# Altium PCB MCB2.PcbDoc
Units mil, origin at the board's own origin, x right, y up, seen from the top; angles counter-clockwise.
Board outline 1299.21 x 792.2 mil, 2 copper layers (Top Layer, Bottom Layer); 45 components, 56 nets, 211 pads, 60 vias.
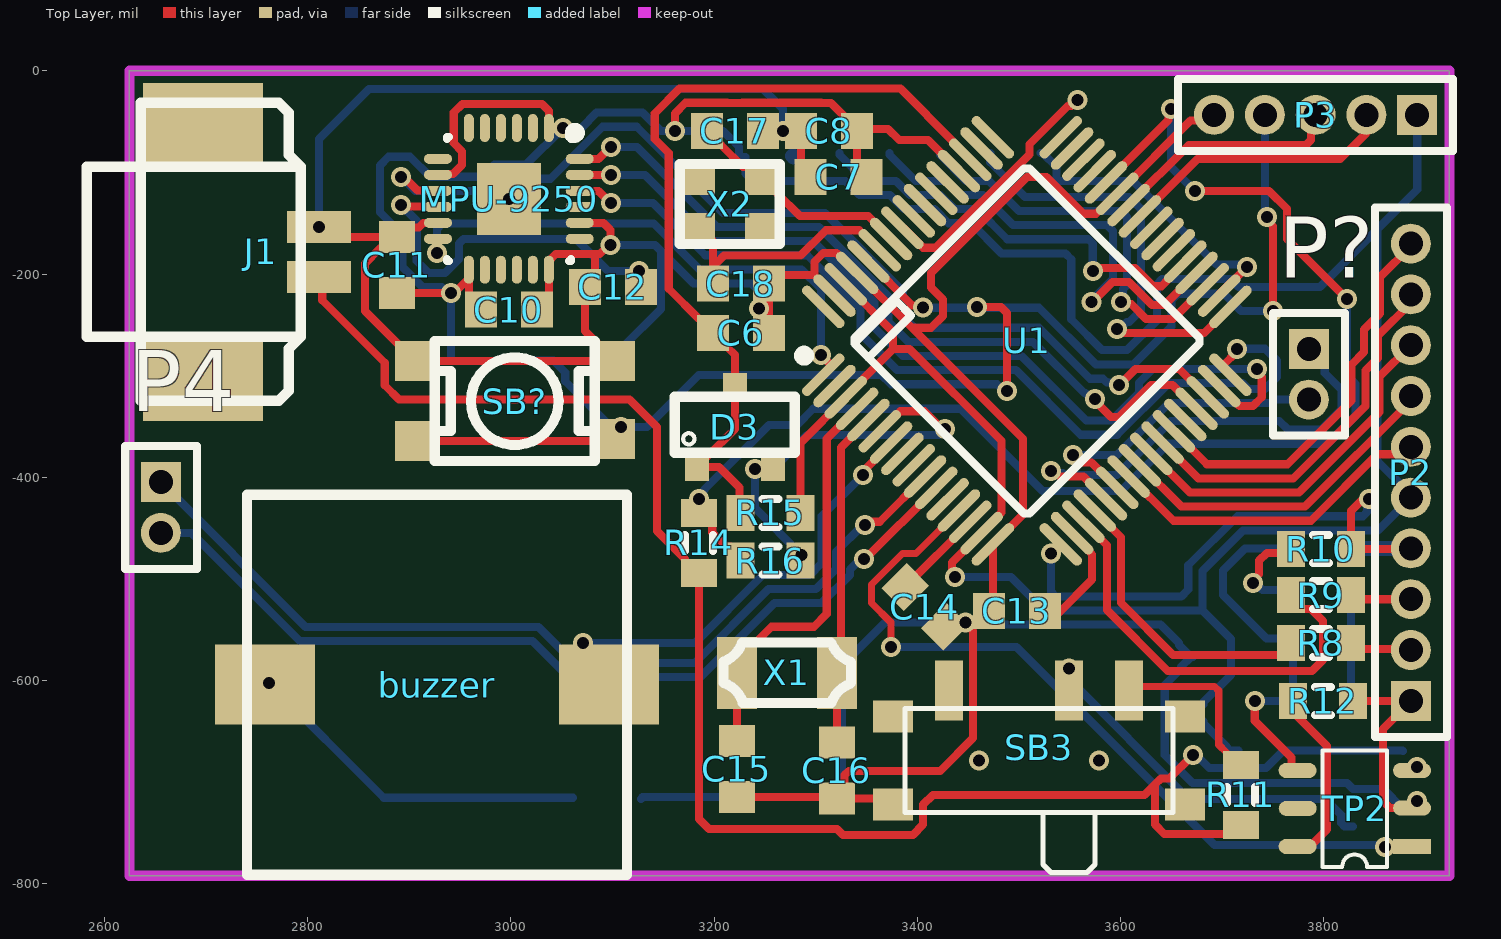
[diagram p0: Top Layer view]
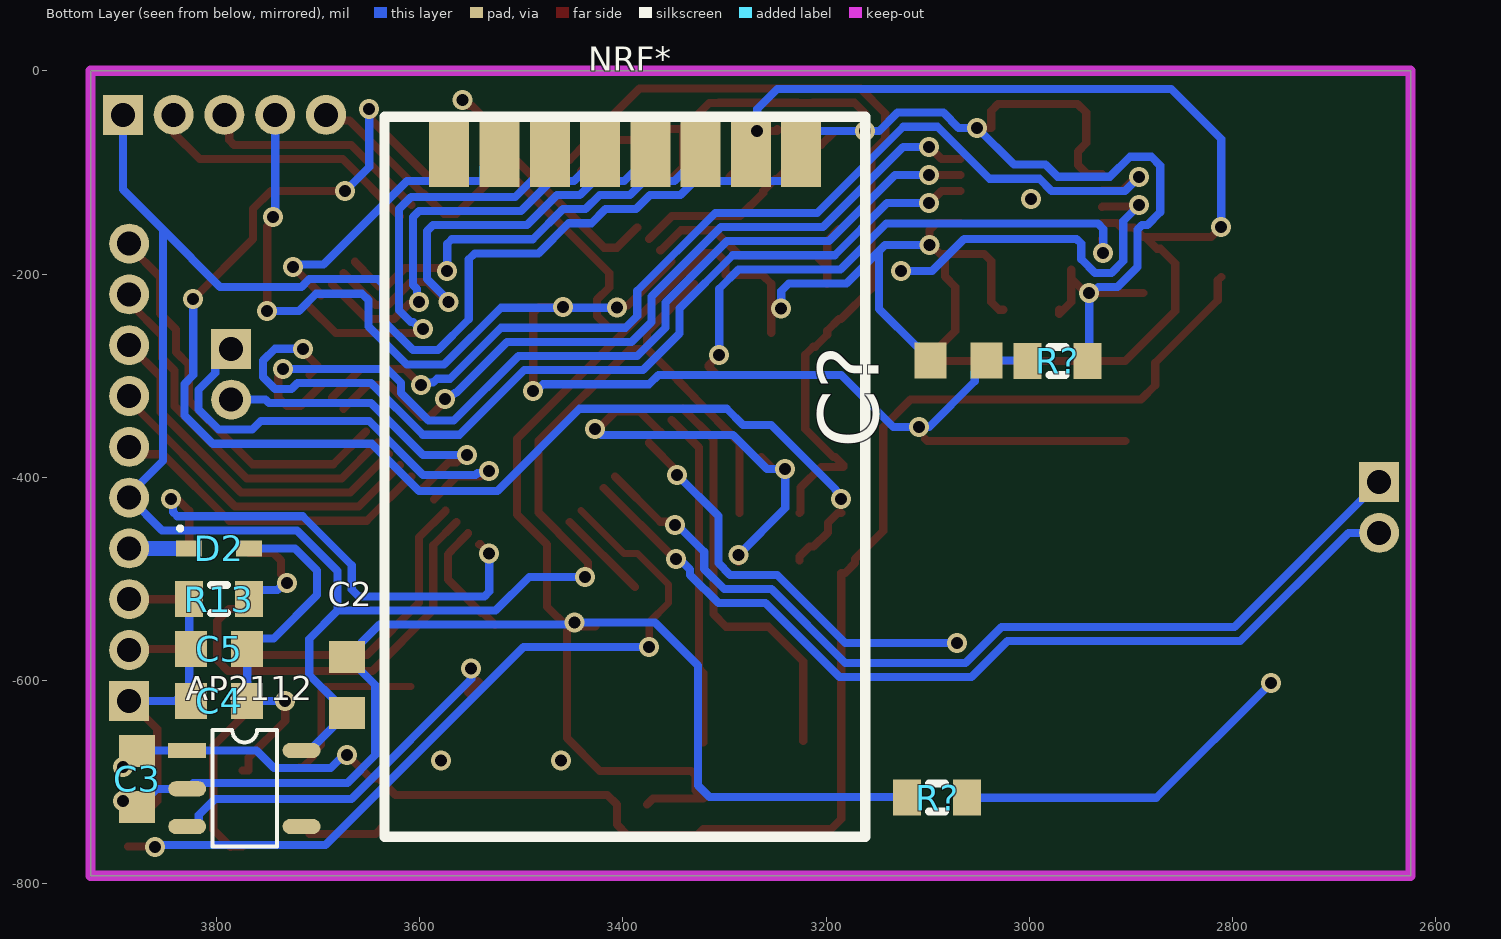
[diagram p1: Bottom Layer view, seen from below]

## Layer stack, top to bottom
Top Solder: solder mask 0.4, Solder Resist, Dk 3.5
Top Layer: signal copper 1.4
Dielectric 1: dielectric 12.6, FR-4, Dk 4.8
Bottom Layer: signal copper 1.4
Bottom Solder: solder mask 0.4, Solder Resist, Dk 3.5

## Board outline
2624.61,-792.2 3923.82,-792.2 3923.82,0 2624.61,0

## Design rules (kind name [scope] priority, off if disabled: settings)
Clearance [All] p1: gap=5.91 ignorepadtopadclearanceinfootprint=FALSE
ComponentClearance [All] p1: gap=7 collisioncheckmode=3 verticalgap=0 showdistances=FALSE
PolygonConnect [All] p1: connectstyle=Relief reliefconductorwidth=10 reliefentries=4 polygonreliefangle="90 Angle" airgapwidth=10
RoutingVias [All] p1: holewidth=28 width=50 viastyle="Through Hole" minholewidth=11.81 minwidth=19.68 maxholewidth=28 maxwidth=50
SolderMaskExpansion [All] p1: expansion=4
Width [All] p1: maxlimit=40 minlimit=7 preferedwidth=20
29 further rules are at their usual default settings.

## Components (designator, comment, footprint, x,y, rotation, side; value= is the part's Value field where it differs from the comment)
AP2112 "AP2112" SOT-23-5 3803.94,-648.82 r180 bottom
buzzer "Buzzer" HN9650B-3 3112.6,-420.54 r270 top
C2 "Cap Semi" 1608[0603] 3671.26,-604.33 r270 bottom value=100pF
C3 "Cap Semi" 1608[0603] 3877.95,-696.85 r90 bottom value=100pF
C4 "Cap Semi" 1608[0603] 3797.24,-620.08 r180 bottom value=100pF
C5 "Cap Semi" 1608[0603] 3797.24,-568.9 r180 bottom value=100pF
C6 "Cap Semi" 1608[0603] 3226.38,-257.85 r180 top value=100pF
C7 "Cap Semi" 1608[0603] 3322.61,-104.33 r0 top value=100pF
C8 "Cap Semi" 1608[0603] 3312.99,-59.06 r0 top value=100pF
C10 "Cap Semi" 1608[0603] 2998.03,-235.14 r180 top value=100pF
C11 "Cap Semi" 1608[0603] 2887.8,-190.94 r270 top value=100pF
C12 "Cap Semi" 1608[0603] 3100.39,-212.6 r0 top value=100pF
C13 "Cap Semi" 1608[0603] 3498.03,-531.5 r0 top value=100pF
C14 "Cap Semi" 1608[0603] 3407.65,-527.56 r135 top value=100pF
C15 "Cap Semi" 1608[0603] 3222.44,-687.01 r270 top value=100pF
C16 "Cap Semi" 1608[0603] 3320.87,-688.56 r270 top value=100pF
C17 "Cap Semi" 1608[0603] 3220.47,-59.06 r0 top value=100pF
C18 "Cap Semi" 1608[0603] 3226.38,-209.57 r0 top value=100pF
C? "Cap Semi" 1608[0603] 3069.43,-285.13 r180 bottom value=100pF
D2 "Schottky" SOD-523 3797.24,-470.08 r180 bottom
D3 "Vref" SOT-23 3220.47,-311.02 r0 top
J1 "Plug2" Terminal_block_2pin_1.25mm_SMD 2696.85,-177.17 r90 top
MPU-9250 "24Pin" QFN_24PIN 2998.03,-125.99 r270 top
NRF* "NRF24L01" NRF24L01_Module_SMD 3161.42,-753.94 r0 bottom
P2 "MHDR1X10" MHDR1X10 3885.83,-620.08 r90 top
P3 "MHDR1X5" MHDR1X5 3892.13,-43.31 r180 top
P4 "MHDR1X2" MHDR1X2 2655.51,-404.72 r270 top
P? "MHDR1X2" MHDR1X2 3785.43,-273.62 r270 top
R8 "Res3" J1-0603 3797.24,-562.99 r0 top value=1K
R9 "Res3" J1-0603 3797.24,-516.14 r0 top value=1K
R10 "Res3" J1-0603 3797.24,-470.47 r0 top value=1K
R11 "Res3" J1-0603 3718.5,-712.6 r90 top value=1K
R12 "Res3" J1-0603 3799.21,-620.08 r180 top value=1K
R13 "Res3" J1-0603 3797.24,-520.08 r180 bottom value=1K
R14 "Res3" J1-0603 3185.04,-464.57 r270 top value=1K
R15 "Res3" J1-0603 3255.46,-435.04 r0 top value=1K
R16 "Res3" J1-0603 3255.46,-482.07 r180 top value=1K
R? "Res3" J1-0603 3090.55,-715.48 r180 bottom value=1K
R? "Res3" J1-0603 2972.22,-285.43 r0 bottom value=1K
SB3 "SPDT" SS-SK-02P 3517.72,-679.13 r0 top
SB? "SPST" "TACK-SW_SMD 2P 4x3mm_2" 2925.2,-384.16 r90 top
TP2 "TP-4057" SOT-23-6 3862.2,-783.46 r180 top
U1 "NUC240SE3AE" MCU_LQFP_64_7x7 3507.87,-265.75 r45 top
X1 "Xtal" FC-135 3258.27,-659.45 r0 top value=32.768k
X2 "Xtal" 2520S 3248.03,-155.58 r180 top value=12M

## Footprints (in the part's own frame and the unit in brackets; to place one, negate y for a bottom-side part, rotate by r counter-clockwise, add the part's x,y. Pads: shape width x height; smd on the part's side, far side on the other; paste and mask are expansions set on the pad)
1608[0603] [mm] "Chip Capacitor, Body 1.6x0.8mm, IPC High Density"
  rect 0.8x0.9 smd: 1(-0.7,0) 2(0.7,0)
  body extent -0.87,-0.48 0.87,0.48, height 1.3
2520S [mm]
  rect 0.9x0.8 smd: 1(0,-1.25) 2(1.65,0) ""(0,0) ""(1.65,-1.25)
  silkscreen extent -0.43,-1.63 2.07,0.37
FC-135 [mm]
  rect 1x1.8 smd: 1(-0.91,1.7) 2(1.59,1.7)
  silkscreen extent -1.24,0.94 1.94,2.46
HN9650B-3 [mm]
  rect 2x2.5 smd: 1(4.665,-0.41) 2(4.665,-9.005)
  silkscreen extent -0.08,-9.46 9.42,0.04
J1-0603 [mm] "Chip Resistor, Body 1.6x0.8mm, IPC High Density"
  rect 0.7x0.9 smd: 1(-0.75,0) 2(0.75,0)
  silkscreen extent -0.2,-0.35 0.2,0.35, body extent -0.85,-0.48 0.85,0.48, height 0.9
MCU_LQFP_64_7x7 [mm]
  oval 1.4x0.25 smd: 1(-4.2,3) 2(-4.2,2.6) 3(-4.2,2.2) 4(-4.2,1.8) 5(-4.2,1.4) 6(-4.2,1) 7(-4.2,0.6) 8(-4.2,0.2) 9(-4.2,-0.2) 10(-4.2,-0.6) 11(-4.2,-1) 12(-4.2,-1.4) 13(-4.2,-1.8) 14(-4.2,-2.2) 15(-4.2,-2.6) 16(-4.2,-3) 33(4.2,-3) 34(4.2,-2.6) 35(4.2,-2.2) 36(4.2,-1.8) 37(4.2,-1.4) 38(4.2,-1) 39(4.2,-0.6) 40(4.2,-0.2) 41(4.2,0.2) 42(4.2,0.6) 43(4.2,1) 44(4.2,1.4) 45(4.2,1.8) 46(4.2,2.2) 47(4.2,2.6) 48(4.2,3)
  oval 0.25x1.4 smd: 17(-3,-4.2) 18(-2.6,-4.2) 19(-2.2,-4.2) 20(-1.8,-4.2) 21(-1.4,-4.2) 22(-1,-4.2) 23(-0.6,-4.2) 24(-0.2,-4.2) 25(0.2,-4.2) 26(0.6,-4.2) 27(1,-4.2) 28(1.4,-4.2) 29(1.8,-4.2) 30(2.2,-4.2) 31(2.6,-4.2) 32(3,-4.2) 49(3,4.2) 50(2.6,4.2) 51(2.2,4.2) 52(1.8,4.2) 53(1.4,4.2) 54(1,4.2) 55(0.6,4.2) 56(0.2,4.2) 57(-0.2,4.2) 58(-0.6,4.2) 59(-1,4.2) 60(-1.4,4.2) 61(-1.8,4.2) 62(-2.2,4.2) 63(-2.6,4.2) 64(-3,4.2)
  silkscreen extent -4.32,-3.1 3.1,3.8, body extent -3.5,-3.5 3.5,3.5, height 1.6
MHDR1X2 [mm] "Connector; Header; 2 Position"
  rect 1x1 hole 0.6: 1(0,0)
  round 1 hole 0.6: 2(1.27,0)
  silkscreen extent -0.9,-0.9 2.17,0.9
MHDR1X5 [mm] "Connector; Header; 5 Position"
  rect 1x1 hole 0.6: 1(0,0)
  round 1 hole 0.6: 2(1.27,0) 3(2.54,0) 4(3.81,0) 5(5.08,0)
  silkscreen extent -0.9,-0.9 5.98,0.9
MHDR1X10 [mm] "Connector; Header; 10 Position"
  rect 1x1 hole 0.6: 1(0,0)
  round 1 hole 0.6: 2(1.27,0) 3(2.54,0) 4(3.81,0) 5(5.08,0) 6(6.35,0) 7(7.62,0) 8(8.89,0) 9(10.16,0) 10(11.43,0)
  silkscreen extent -0.9,-0.9 12.33,0.9
NRF24L01_Module_SMD [mm]
  rect 1x1.7 smd: 1(1.6,-17.1) 2(2.857,-17.1) 3(4.114,-17.1) 4(5.371,-17.1) 5(6.629,-17.1) 6(7.886,-17.1) 7(9.143,-17.1) 8(10.4,-17.1)
  silkscreen extent 0,-18 12.02,0
QFN_24PIN [mm]
  oval 0.7x0.249 smd: 1(-1.772,1) 2(-1.772,0.6) 3(-1.772,0.2) 4(-1.772,-0.2) 5(-1.772,-0.6) 6(-1.772,-1) 13(1.772,-1) 14(1.772,-0.6) 15(1.772,-0.2) 16(1.772,0.2) 17(1.772,0.6) 18(1.772,1)
  oval 0.249x0.7 smd: 7(-1,-1.772) 8(-0.6,-1.772) 9(-0.2,-1.772) 10(0.2,-1.772) 11(0.6,-1.772) 12(1,-1.772) 19(1,1.772) 20(0.6,1.772) 21(0.2,1.772) 22(-0.2,1.772) 23(-0.6,1.772) 24(-1,1.772)
  rect 1.8x1.6 smd: 25(0,0)
  silkscreen extent -1.77,-1.55 1.55,1.78, body extent -1.55,-1.55 1.55,1.55, height 1
SOD-523 [mm] "SODFL, 2-Leads, Body 0.80x1.60mm, IPC Medium Density"
  rect 0.65x0.4 smd: 1(-0.75,0) 2(0.75,0)
  silkscreen extent -1.03,0.45 -0.93,0.55, body extent -0.65,-0.45 0.65,0.45, height 0.65
SOT-23 [mm]
  rect 0.6x0.7 smd: 1(-0.95,-2) 2(0,0) 3(0.95,-2)
  silkscreen extent -1.5,-1.65 1.5,-0.25
SOT-23-5 [mm]
  rect 0.95x0.38 smd: 1(-0.63,-0.51)
  oval 0.95x0.38 smd: 2(-0.63,-1.47) 3(-0.63,-2.41) 4(2.23,-2.41) 5(2.23,-0.51)
  silkscreen extent 0,-2.91 1.61,0
SOT-23-6 [mm]
  rect 0.95x0.38 smd: 1(-0.63,-0.51)
  oval 0.95x0.38 smd: 2(-0.63,-1.47) 3(-0.63,-2.41) 4(2.23,-2.41) 5(2.227,-1.461) 6(2.23,-0.51)
  silkscreen extent 0,-2.91 1.61,0
SS-SK-02P [mm]
  rect 0.7x1.5 smd: 1(-2.195,1.76) 2(0.805,1.76) 3(2.305,1.76)
  rect 1x0.8 smd: ""(-3.595,-1.09) ""(-3.595,1.11) ""(3.705,-1.09) ""(3.705,1.11)
  silkscreen extent -3.29,-2.79 3.41,1.31
"TACK-SW_SMD 2P 4x3mm_2" [mm]
  rect 1x1 smd: 1(0.5,0.5) 1(0.55,-4.5) 2(2.5,0.5) 2(2.5,-4.5)
  silkscreen extent 0,-4 3,0
Terminal_block_2pin_1.25mm_SMD [mm]
  rect 0.8x1.6 smd: 1(-0.65,-2.9) 2(0.6,-2.9)
  rect 2.1x3 smd: ""(-3.2,0) ""(3.15,0)
  silkscreen extent -3.75,-2.45 3.7,2.9

## Part data
C2 C3 C4 C5 C6 C7 C8 C10 C11 C12 C13 C14 C15 C16 C17 C18 C?: "Capacitor (Semiconductor SIM Model)", LatestRevisionDate=29-May-2009, LatestRevisionNote="IPC-7351 Footprint Added.", PackageDescription="Chip Capacitor", PackageReference=C1206, Published=8-Jun-2000, Publisher="Altium Limited"
D2: library part Diode2
MPU-9250: library part MPU-9250_2
NRF*: library part NRF24L01_module
P2: "Header, 10-Pin", LatestRevisionDate=17-Jul-2002, LatestRevisionNote="Re-released for DXP Platform.", Publisher="Altium Limited"
P3: "Header, 5-Pin", LatestRevisionDate=17-Jul-2002, LatestRevisionNote="Re-released for DXP Platform.", Publisher="Altium Limited"
P4 P?: "Header, 2-Pin", LatestRevisionDate=17-Jul-2002, LatestRevisionNote="Re-released for DXP Platform.", Publisher="Altium Limited"
R8 R9 R10 R11 R12 R13 R14 R15 R16 R? R?: "Resistor", LatestRevisionDate=29-May-2009, LatestRevisionNote="IPC-7351 Footprint Added.", PackageDescription="Chip Resistor", PackageReference=J1-0603, Published=8-Jun-2000, Publisher="Altium Limited"
SB3: library part Switch_Button2
SB?: library part Switch_Button1
U1: OriginalSymbolOrigin=(0,0)

## Via types
v1: diameter 19.68, hole 11.81, Top Layer to Bottom Layer, 59 vias
v2: diameter 19.68, hole 11.81, Top Layer to Bottom Layer, tented top, 1 vias

## Nets (pads, with @x,y where several pads share a name; then routed paths per layer and width w, separated by ;. In a path a pad name is that pad's centre, name@x,y a point inside that pad or via, vN(x,y) a via of type N, cw(c..) or ccw(c..) an arc to the next point about the centre after c; other vN are vias at no path point)
ADC0: R14.1 R16.2 U1.44 | length 1336.7
  Top Layer w8: R14.1 3188.43,-435.04 3198.21,-444.82 3198.21,-454.34 3212.22,-468.35 3216.15,-468.35 3225.93,-478.13 R16.2 ; U1.44 3647.37,-48.3 3647.37,-39.64 v1(3649.61,-37.4) ; v1(3673.23,-118.11) 3746.25,-118.11 3763.91,-135.77 3763.91,-165.48 v1(3822.83,-224.41)
  Bottom Layer w8: v1(3185.04,-421.26) 3185.04,-418.1 3190.52,-412.62 3190.52,-411.85 3253.94,-348.43 3281.88,-348.43 3297.7,-332.61 3442.48,-332.61 3523.32,-413.45 3600.61,-413.45 3646.94,-367.12 3803.45,-367.12 3831.46,-339.11 3831.46,-308.13 3822.83,-299.51 v1(3822.83,-224.41) ; v1(3649.61,-37.4) 3649.61,-94.49 v1(3673.23,-118.11)
ADC1: U1.45
ADC2: U1.46
ADC3: U1.47
ADC4: U1.48
ADC5: U1.49
ADC6: U1.50
ADC_ONOFF: D3.3 R16.1 U1.6 | length 423.6
  Top Layer w8: v1(3240.16,-391.73) 3251.97,-391.73 D3.3@3263.73,-379.97 ; R16.1 3286.25,-483.33 v1(3286.25,-476.38) ; U1.6 3363.61,-354.83 3383.31,-335.13 3393.53,-335.13 3407.29,-335.13 3424.52,-352.36 v1(3427.17,-352.36)
  Bottom Layer w8: v1(3286.25,-476.38) 3240.16,-430.29 v1(3240.16,-391.73) 3258.24,-391.73 3291.71,-358.27 3421.26,-358.27 v1(3427.17,-352.36)
AVDD: AP2112.5 C2.2 C7.2 C8.2 C10.2 C11.2 MPU-9250.1 MPU-9250.8 MPU-9250.13 NRF*.1 P2.5 P3.1 R15.2 R?.1@2942.69,-285.43 U1.3 U1.15 U1.52 U1.62 | length 3905.8
  Top Layer w8: C11.2 v1(2940.94,-218.5) 2944.32,-218.5 MPU-9250.13@2958.66,-204.16 ; MPU-9250.8@2928.25,-101.42 2943.26,-101.42 2951.93,-92.75 2951.93,-79.3 2943.86,-71.22 2943.86,-41.19 2952.53,-32.52 3030.55,-32.52 3037.4,-39.37 MPU-9250.1 v1(3051.18,-56.21) ; MPU-9250.13 MPU-9250.13@2958.66,-204.16 ; C10.2 2970.47,-239.38 2958.66,-227.57 MPU-9250.13@2958.66,-204.16 ; v1(3161.42,-59.06) 3161.42,-41.96 3171.95,-31.43 3212.76,-31.43 3212.83,-31.5 3228.12,-31.5 3228.18,-31.43 3305.28,-31.43 3305.35,-31.5 3314.96,-31.5 C8.2@3340.55,-57.09 ; R15.2 3284.99,-366.14 U1.3 3329.71,-320.93 3346.63,-304 3346.63,-303.19 3376.21,-273.62 ; U1.62 3329.71,-210.57 3376.21,-257.07 3376.21,-273.62 ; C8.2 3340.55,-94.71 C7.2 ; C8.2@3340.55,-55.12 C8.2@3340.55,-57.09 ; C8.2@3341.54,-58.07 C8.2@3340.55,-57.09 ; v1(3437.01,-498.03) 3434.29,-495.31 3434.29,-484.1 U1.15 3463.33,-454.55 3483.03,-434.86 3483.03,-364.13 3392.52,-273.62 3376.21,-273.62 ; U1.52 3410.44,-68.09 3382.32,-68.09 3371.32,-57.09 C8.2@3340.55,-57.09
  Bottom Layer w8: R?.1@2942.69,-285.43 2940.94,-283.68 v1(2940.94,-218.5) 2937.78,-218.5 2932.07,-212.79 2913.23,-212.79 2893.51,-193.07 2893.51,-165.19 2893.57,-165.13 2893.57,-156.32 2888.89,-151.64 2883.55,-151.64 2871.09,-139.18 2871.09,-93.11 2879.62,-84.58 2900.95,-84.58 2920.57,-104.2 2972.22,-104.2 2984.09,-92.33 3015.05,-92.33 v1(3051.18,-56.21) 3069.43,-56.21 3084.49,-41.15 3129.71,-41.15 3147.63,-59.06 v1(3161.42,-59.06) 3208.72,-59.06 3224.41,-74.74 NRF*.1 ; NRF*.1@3228.91,-84.65 3230.88,-84.65 3230.88,-100.96 3238.25,-108.33 3329.44,-108.33 3343.34,-122.24 3373.17,-122.24 3387.08,-136.14 3416.91,-136.14 3430.81,-150.05 3453.28,-150.05 3482.87,-179.64 3545.78,-179.64 3551.64,-185.5 3551.64,-244.55 3581.99,-274.9 3606.6,-274.9 3635.83,-245.67 3635.83,-210.3 3641.1,-205.03 3708.6,-205.03 3716.23,-212.66 3796.45,-212.66 3852.74,-156.37 ; v1(3437.01,-498.03) 3492.13,-498.03 3525.23,-531.14 3680.71,-531.14 ; C2.2 C2.2@3673.23,-631.89 ; AP2112.5 3704.96,-668.9 3704.94,-665.57 3681.48,-642.11 3681.48,-640.14 C2.2@3673.23,-631.89 ; P3.1 3892.13,-116.98 3852.74,-156.37 ; C2.2@3673.23,-631.89 3681.48,-623.64 3681.48,-621.67 3708.66,-594.49 3708.66,-559.09 3680.71,-531.14 ; 3680.71,-531.14 3680.71,-492.43 3720.84,-452.3 3853.61,-452.3 P2.5 3885.83,-416.88 3852.74,-383.79 3852.74,-156.37
button: P2.10 U1.27 | length 392.6
  Top Layer w8: U1.27 3685.03,-387.23 3764.37,-387.23 3827.26,-324.34 3827.26,-289.32 3839.65,-276.93 3839.65,-254.75 3855.49,-238.9 3855.49,-203.05 3885.83,-172.72 P2.10
buzzer: buzzer.1 U1.7 | length 414.5
  Top Layer w8: v1(3346.46,-397.64) 3346.46,-394.26 3374.25,-366.47 U1.7
  Bottom Layer w8: v1(3070.87,-562.99) 3181.1,-562.99 3247.97,-496.13 3294.43,-496.13 3306,-484.56 3306,-438.1 v1(3346.46,-397.64)
CHRG: TP2.1 U1.13 | length 780
  Top Layer w7: v1(3374.02,-566.93) 3374.02,-542.78 3355.1,-523.86 3355.1,-505.57 3385.66,-475 3398.84,-475 U1.13
  Top Layer w8: v1(3860.24,-763.78) 3860.43,-763.58 3886.81,-763.58 TP2.1
  Bottom Layer w8: v1(3374.02,-566.93) 3497.7,-566.93 3692.58,-761.81 3858.27,-761.81 v1(3860.24,-763.78)
D12I: C18.1 U1.59 X2.2 | length 244.4
  Top Layer w8: X2.2@3187.01,-155.58 3187.07,-155.58 3198.82,-167.33 3198.82,-188.45 ; C18.1 3198.82,-188.45 ; U1.59 3362.61,-176.66 3342.92,-156.97 3310.16,-156.97 3285.18,-181.95 3209.78,-181.95 3203.28,-188.45 3198.82,-188.45
D12O: C17.1 U1.58 X2.1 | length 227.7
  Top Layer w8: C17.1 3192.91,-61.02 3204.66,-72.77 3206.63,-72.77 3228.48,-94.62 3236.28,-94.62 X2.1 3250,-106.37 3261.75,-118.11 3261.75,-120.08 3284.73,-143.06 3351.78,-143.06 U1.58
D+: R8.1 U1.20 | length 294.9
  Top Layer w8: U1.20 3574.69,-433.28 3600.52,-459.11 3600.52,-523.58 3651.87,-574.94 3755.77,-574.94 R8.1
D-: R9.1 U1.19 | length 421
  Top Layer w8: U1.19 3586.61,-466.98 3586.61,-530.68 3646.55,-590.61 3788.56,-590.61 3799.21,-579.96 3799.21,-541.34 3787.73,-529.86 3777.5,-529.86 3767.72,-520.08 R9.1
DVBUS: D2.1 P2.4 R10.2 U1.17 | length 605.9
  Top Layer w8: v1(3531.5,-475) 3540.31,-466.19 U1.17 3541.1,-466 U1.17@3539.89,-466 ; v1(3844.48,-421.26) 3838.58,-421.26 3826.77,-433.06 R10.2 3885.43,-470.47 P2.4
  Bottom Layer w8: v1(3531.5,-475) 3531.5,-512.54 3536.18,-517.23 3659.94,-517.23 3666.8,-510.37 3666.8,-486.67 3715.08,-438.39 3838.58,-438.39 3842.65,-434.32 3842.65,-423.09 v1(3844.48,-421.26)
  Bottom Layer w15: D2.1 P2.4
GND: AP2112.2 C2.1 C3.1 C4.1 C5.1 C6.1 C7.1 C8.1 C10.1 C11.1 C12.1 C13.1 C14.1 C15.2 C16.2 C17.2 C18.2 C?.1 J1.2 MPU-9250.11 MPU-9250.18 MPU-9250.20 NRF*.2 P2.1 P3.5 R12.1 R13.1 R?.1@3120.08,-715.48 SB3.@3376.18,-722.05 SB?.2 TP2.2 U1.16 U1.43 U1.61 U1.63 | length 4717.1
  Top Layer w8: v1(2811.02,-153.54) 2820.87,-163.39 C11.1@2885.83,-163.39 ; MPU-9250.11 2927.91,-149.95 2913.84,-149.95 2909.42,-154.37 2896.81,-154.37 C11.1 C11.1@2885.83,-163.39 ; C10.1 3029.83,-235.14 3037.4,-227.57 3037.4,-187.01 3044.25,-180.16 3082.83,-180.16 ; MPU-9250.20 3091.07,-149.61 3098.06,-156.6 v1(3098.06,-171.49) 3096.2,-171.49 3087.53,-180.16 3082.83,-180.16 ; C15.2 3319.31,-714.57 C16.2 ; C17.2@3248.03,-57.09 C17.2 3283.46,-59.06 3285.43,-57.09 C8.1 3285.43,-94.71 C7.1 ; C6.1 C18.2 3262.5,-201.01 3298.87,-201.01 3298.87,-187.92 3307.56,-179.24 3320.64,-179.24 3340.34,-198.93 U1.61 3394.83,-252.92 ; SB3.@3376.18,-722.05 3370.26,-716.12 C16.2 ; C14.1 C14.1@3443.76,-547.05 ; P3.5 3686.47,-48.97 3668.98,-48.97 U1.43 3596.46,-120.99 3596.06,-120.58 3575.96,-140.68 3563.67,-140.68 3527.32,-104.33 3508.09,-104.33 3413.39,-199.04 3413.39,-213.12 3425.26,-224.99 3425.26,-241.35 3413.69,-252.92 3394.83,-252.92 ; R12.1 P2.1 3858.27,-647.64 3858.27,-718.5 3865.35,-725.59 TP2.2 ; C11.1@2885.83,-163.39 2874.08,-175.13 2870.89,-175.13 2856.3,-189.73 2856.3,-236.52 2905.51,-285.73 3102.36,-285.73 3072.83,-256.21 C12.1 3082.83,-202.61 3082.83,-180.16 ; C16.2 3328.59,-708.39 3328.59,-693.06 3332.68,-688.98 3422.66,-688.98 3454.98,-656.65 3454.98,-551.18 3450.85,-547.05 C14.1@3443.76,-547.05 ; 3394.83,-252.92 3504.06,-362.16 3504.06,-436.59 U1.16 3474.47,-527.5 C13.1 3458.84,-543.13 v1(3447.67,-543.13) C14.1@3443.76,-547.05
  Bottom Layer w8: v1(2811.02,-153.54) 2811.02,-66.93 2860.24,-17.72 3248.03,-17.72 3267.72,-37.4 v1(3267.72,-59.06) ; C?.1 3096.99,-283.16 3108.74,-271.41 3110.71,-271.41 3147.74,-234.38 3147.74,-177.17 ; v1(3098.06,-171.49) 3142.06,-171.49 3147.74,-177.17 ; R?.1@3127.95,-716.54 3129.71,-714.78 3314.75,-714.78 3326,-703.52 3326,-585.39 3368.27,-543.13 v1(3447.67,-543.13) 3449.58,-545.04 3639.53,-545.04 3657.54,-563.06 3657.54,-565.02 C2.1@3669.29,-576.77 ; v1(3244.09,-233.75) 3244.09,-216.71 3236.68,-209.29 3179.86,-209.29 3147.74,-177.17 ; C2.1 C2.1@3669.29,-576.77 ; P3.5@3685.04,-43.31 P3.5 ; R13.1 3826.77,-606.3 3840.55,-620.08 P2.1 ; C3.1 3875.98,-724.41 3867.74,-716.16 3867.74,-715.48 3858.95,-706.69 AP2112.2 3822.83,-700.79 3670.89,-700.79 3643.64,-673.53 3643.64,-604.39 3659.54,-588.49 3659.54,-586.52 C2.1@3669.29,-576.77
  Bottom Layer w15: NRF*.2@3277.56,-83.8 NRF*.2@3278.4,-84.65
  other v1: 3892.13,-718.5
ICE_CLK: P3.3 U1.42 | length 232.6
  Top Layer w8: U1.42 3667.32,-72.9 3754.38,-72.9 3754.45,-72.83 3782.72,-72.83 3787.4,-68.15 3787.4,-48.03 P3.3
ICE_DAT: P3.2 U1.41 | length 274.7
  Top Layer w8: U1.41 3675.68,-86.8 3816.41,-86.8 3842.13,-61.09 P3.2
LED1: P2.6 U1.23 | length 325.9
  Top Layer w8: U1.23 3608.59,-399.37 3652.07,-442.85 3787.41,-442.85 3852.92,-377.34 3878.57,-377.34 P2.6
LED2: P2.7 U1.24 | length 331.3
  Top Layer w8: U1.24 3659.94,-428.94 3781.65,-428.94 3885.83,-324.77 P2.7
LED3: P2.8 U1.25 | length 351.7
  Top Layer w8: U1.25 3668.3,-415.04 3775.89,-415.04 3855.07,-335.86 3855.07,-300.84 P2.8
LED4: P2.9 U1.26 | length 372.2
  Top Layer w8: U1.26 3676.67,-401.13 3770.13,-401.13 3841.16,-330.1 3841.16,-295.08 3853.55,-282.69 3853.55,-260.51 3885.83,-228.23 P2.9
MPU_INT: MPU-9250.12 U1.1 | length 536.7
  Top Layer w8: v1(2927.17,-179.13) 2927.71,-178.59 2927.71,-165.9 MPU-9250.12 ; v1(3305.12,-279.5) 3315.5,-289.88 3315.5,-291.09 U1.1
  Bottom Layer w8: v1(2927.17,-179.13) 2927.17,-155.51 2932.23,-150.45 3140.68,-150.45 3185.62,-195.39 3286.02,-195.39 3305.12,-214.49 v1(3305.12,-279.5)
NetAP2112_3: AP2112.3 SB3.2 | length 362.4
  Top Layer w15: SB3.2@3543.9,-604.33 SB3.2
  Bottom Layer w8: v1(3549.21,-588.49) 3549.21,-598.77 3666.97,-716.54 3801.57,-716.54 3817.36,-732.32 3817.36,-740.49 3820.57,-743.7 AP2112.3
Netbuzzer_2: buzzer.2 R?.2@3061.02,-715.48 | length 346.1
  Bottom Layer w8: v1(2761.81,-602.36) 2874.93,-715.48 R?.2@3061.02,-715.48
NetC12_2: C12.2 MPU-9250.10 | length 358.6
  Top Layer w8: v1(2891.73,-131.89) 2893.35,-133.52 2927.91,-133.52 MPU-9250.10
  Bottom Layer w8: v1(2891.73,-131.89) 2907.48,-147.64 2907.48,-170.89 2907.42,-170.95 2907.42,-187.31 2918.99,-198.88 2935.35,-198.88 2948.82,-185.41 2948.82,-170.04 2953.51,-165.35 3064,-165.35 3095.49,-196.85 v1(3125.98,-196.85)
NetC13_2: C13.2 U1.18 | length 118.8
  Top Layer w8: C13.2@3525.59,-545.28 3537.34,-533.53 3539.31,-533.53 3572.11,-500.72 3572.11,-476.05 3569.34,-473.28 3569.34,-472.48 3552.42,-455.55 U1.18
NetC14_2: C14.2 U1.14 | length 90.7
  Top Layer w8: C14.2 3388.17,-507.95 U1.14
NetP2_2: P2.2 R8.2 | length 59.5
  Top Layer w8: R8.2@3826.77,-568.9 P2.2@3884.65,-568.9
  Top Layer w15: P2.2@3884.65,-568.9 P2.2
NetP2_3: P2.3 R9.2 | length 59.1
  Top Layer w8: R9.2@3826.77,-520.08 P2.3
NetR11_2: R11.2 SB3.3 | length 176.3
  Top Layer w7: SB3.3@3608.46,-605.91 3692.52,-605.91 3696.77,-610.16 3696.77,-663.3 3704.29,-670.82 3704.29,-674.76 3714.57,-685.04 R11.2@3718.5,-685.04
NetR12_2: R12.2 TP2.6 | length 176.4
  Top Layer w8: R12.2 3769.68,-631.21 3803.15,-664.68 3803.15,-746.61 3785.98,-763.78 3785.59,-763.39 TP2.6
NRF_CE: NRF*.3 U1.37 | length 424.5
  Top Layer w8: v1(3572.83,-196.85) 3575.77,-193.91 3614.33,-193.91 3632.45,-212.03 3640.33,-212.03 3646.84,-205.52 3646.84,-205.23 3663.77,-188.3 U1.37
  Bottom Layer w8: NRF*.3 3323.4,-82.62 3349.1,-108.33 3378.93,-108.33 3392.84,-122.24 3422.67,-122.24 3436.57,-136.14 3459.04,-136.14 3488.63,-165.73 3568.4,-165.73 3572.83,-170.16 v1(3572.83,-196.85)
NRF_IRQ: NRF*.8 U1.57 | length 246.5
  Top Layer w8: U1.57 3385.88,-154.39 3405.58,-174.09 3418.67,-174.09 3510.45,-82.31 3510.45,-72.23 3548.2,-34.47 3551.74,-34.47 v1(3557.59,-28.63)
RESET: C?.2 P3.4 R?.2@3001.75,-285.43 SB?.1 U1.60 | length 1540
  Top Layer w8: SB?.1@2905.51,-364.47 3100.39,-364.47 SB?.1@3102.36,-362.5 ; U1.60 3395.11,-230.93 3403.28,-230.93 v1(3405.51,-233.17) ; v1(3458.66,-232.28) 3482.28,-232.28 3488.19,-238.19 v1(3488.19,-314.96) ; v1(3744.09,-143.88) 3744.16,-147.11 3750,-152.95 v1(3750,-236.22)
  Bottom Layer w8: R?.2@3001.75,-285.43 3002.05,-285.13 C?.2 3053.62,-296.88 3053.62,-305.59 3098.43,-350.39 v1(3108.27,-350.39) 3133.86,-350.39 3185,-299.25 3365,-299.25 3374.29,-308.54 3478.61,-308.54 3485.03,-314.96 v1(3488.19,-314.96) ; v1(3405.51,-233.17) 3519.88,-233.17 3575.89,-289.18 3612.69,-289.18 3650.23,-251.64 3650.23,-225.75 3656.55,-219.44 3701.92,-219.44 3718.71,-236.22 v1(3750,-236.22) ; P3.4 3742.13,-141.91 v1(3744.09,-143.88)
SPI0_CLK: MPU-9250.23 U1.31 | length 892.1
  Top Layer w8: MPU-9250.23 v1(3098.43,-102.37) ; U1.31 3697.68,-310.29 3717.38,-329.99 3730.46,-329.99 3739.15,-321.3 3739.15,-301.37 3734.25,-296.47 v1(3734.25,-293.31)
  Bottom Layer w8: v1(3098.43,-102.37) 3131.93,-102.37 3197.14,-167.57 3297.54,-167.57 3357.95,-227.99 3357.95,-252.87 3385.81,-280.73 3502.8,-280.73 3566.37,-344.3 3591.1,-344.3 3618.17,-317.23 3618.17,-307.03 3631.83,-293.37 3734.19,-293.37 v1(3734.25,-293.31)
SPI0_CSN: MPU-9250.22 U1.32 | length 923.6
  Top Layer w8: MPU-9250.22 3086.25,-118.11 3098.05,-129.92 v1(3098.43,-129.92) ; U1.32 3700.67,-291.52 3700.67,-290.31 3714.57,-276.42 v1(3714.57,-273.62)
  Bottom Layer w8: v1(3098.43,-129.92) 3139.82,-129.92 3191.38,-181.48 3291.78,-181.48 3344.05,-233.75 3344.05,-258.63 3380.05,-294.64 3497.04,-294.64 3560.61,-358.2 3596.86,-358.2 3647.79,-307.28 3720.29,-307.28 3726.07,-313.06 3742.43,-313.06 3754,-301.49 3754,-285.13 3742.43,-273.56 v1(3714.57,-273.62) v1(3714.57,-273.62)
SPI0_MISO: MPU-9250.9 U1.30 | length 1006.4
  Top Layer w8: v1(2891.73,-104.33) 2894.89,-104.33 2908.33,-117.77 2927.91,-117.77 MPU-9250.9 ; v1(3598.42,-309.05) 3598.93,-309.05 3614.68,-293.31 3657.92,-293.31 U1.30
  Bottom Layer w8: v1(2891.73,-104.33) 2892.12,-104.33 2905.9,-118.11 2977.98,-118.11 2989.85,-106.24 3039.06,-106.24 3090.25,-55.06 3123.95,-55.06 3208.66,-139.76 3309.06,-139.76 3385.76,-216.47 3385.76,-241.35 3397.33,-252.92 3413.69,-252.92 3413.77,-252.84 3519.88,-252.84 3570.13,-303.09 3582.98,-303.09 3586.71,-306.82 3596.18,-306.82 v1(3598.42,-309.05)
SPI0_MOSI: MPU-9250.24 U1.29 | length 760.6
  Top Layer w8: MPU-9250.24 3086.25,-86.62 3098.06,-74.8 v1(3098.43,-74.8) ; v1(3574.8,-322.83) 3574.8,-324.8 3590.55,-340.55 3598.43,-340.55 3629.92,-309.06 3651.4,-309.06 U1.29
  Bottom Layer w8: v1(3098.43,-74.8) 3124.04,-74.8 3202.9,-153.67 3303.3,-153.67 3371.86,-222.23 3371.86,-247.11 3391.57,-266.82 3419.45,-266.82 3419.53,-266.74 3514.13,-266.74 3564.38,-316.99 3565.79,-316.99 3571.63,-322.83 v1(3574.8,-322.83)
SPI1_CLK: NRF*.5 U1.35 | length 392.9
  Top Layer w8: 3610.89,-229.8 3625.31,-244.22 3651.89,-244.22 U1.35
  Bottom Layer w8: NRF*.5 3422.38,-82.62 3448.09,-108.33 3470.56,-108.33 3500.15,-137.92 3600.52,-137.92 3606.48,-143.88 3606.48,-210.79 3602.53,-214.74 3602.53,-225.43 v1(3600.39,-227.57)
SPI1_CSN: NRF*.4 U1.36 | length 465.5
  Top Layer w8: v1(3571.39,-227.57) 3572.47,-227.57 3592.21,-207.82 3608.57,-207.82 3631.07,-230.32 3643.53,-230.32 U1.36
  Bottom Layer w8: NRF*.4 3372.89,-82.62 3398.6,-108.33 3428.43,-108.33 3442.33,-122.24 3464.8,-122.24 3494.39,-151.83 3586.87,-151.83 3592.58,-157.54 3592.58,-205.03 3571.39,-226.22 v1(3571.39,-227.57)
SPI1_MISO: NRF*.7 U1.34 | length 295.8
  Top Layer w8: U1.34 3697.18,-220.14 v1(3724.41,-192.91)
  Bottom Layer w8: NRF*.7 3523.34,-80.71 3537.06,-94.43 3537.06,-105.95 3539.43,-108.33 3612.27,-108.33 3694.61,-190.68 3722.17,-190.68 v1(3724.41,-192.91)
SPI1_MOSI: NRF*.6 U1.33 | length 432.2
  Top Layer w8: v1(3596.45,-253.94) 3600.64,-258.13 3682.53,-258.13 U1.33
  Bottom Layer w8: NRF*.6 3471.88,-89.99 3505.91,-124.02 3608.29,-124.02 3620.39,-136.11 3620.39,-235.64 3608.71,-247.31 3606.23,-247.31 3599.61,-253.94 v1(3596.45,-253.94)
STDBY: TP2.5
UART_0_RX: P?.1 U1.21 | length 460.3
  Top Layer w8: v1(3531.5,-393.7) 3534.66,-393.7 3540.33,-399.37 3563.55,-399.37 U1.21
  Bottom Layer w8: v1(3531.5,-393.7) 3533.73,-395.94 3543.21,-395.94 3544.97,-397.7 3596.7,-397.7 3649.61,-344.79 3756.33,-344.79 3764.75,-353.21 3797.69,-353.21 3815.02,-335.88 3815.02,-335.83 3817.55,-333.3 3817.55,-313.89 3801.12,-297.46 3801.12,-289.31 P?.1
UART_0_TX: P?.2 U1.22 | length 312.1
  Top Layer w8: v1(3553.15,-377.95) 3556.16,-377.95 3563.68,-385.47 3571.42,-385.47 3596.46,-410.51 U1.22
  Bottom Layer w8: v1(3553.15,-377.95) 3596.78,-377.95 3647.77,-326.96 3748.19,-326.96 3751.53,-323.62 P?.2
UART_1_RX: P4.1 U1.10 | length 911.7
  Top Layer w8: v1(3348.43,-446.85) 3351.41,-443.86 3363.17,-443.86 U1.10
  Bottom Layer w8: P4.1 2798.03,-547.24 3027.19,-547.24 3062.69,-582.74 3181.02,-582.74 3253.73,-510.03 3300.19,-510.03 3319.9,-490.32 3319.9,-473.4 3346.46,-446.85 v1(3348.43,-446.85)
UART_1_TX: P4.2 U1.11 | length 902.5
  Top Layer w8: v1(3347.56,-480.32) 3348.35,-480.32 3348.67,-480.63 U1.11
  Bottom Layer w8: P4.2 2685.85,-454.72 2792.27,-561.15 3021.43,-561.15 3056.93,-596.65 3186.78,-596.65 3259.49,-523.94 3305.95,-523.94 3333.81,-496.08 3333.81,-490.82 3342.08,-482.55 3345.33,-482.55 v1(3347.56,-480.32)
USB_INT: R10.1 R13.2 | length 108.5
  Top Layer w8: v1(3730.32,-503.94) 3730.32,-501.6 3736.44,-495.48 3736.44,-482.07 3744.09,-474.41 3767.72,-474.41 R10.1
  Bottom Layer w8: v1(3730.32,-503.94) 3732.65,-503.94 3739.78,-511.07 3761.44,-511.07 3767.72,-517.35 R13.2
V_BAT: AP2112.1 C3.2 J1.1 R11.1 R14.2 TP2.3 | length 1713.2
  Top Layer w8: J1.1 2814.43,-206.16 2814.43,-225.82 2875.92,-287.31 2875.92,-309.52 2890.02,-323.62 3116.93,-323.62 3143.7,-350.39 3143.7,-452.76 3171.32,-480.38 3171.32,-484.31 3181.1,-494.09 R14.2 3185.04,-736.22 3194.88,-746.06 3320.87,-746.06 3326.77,-751.97 3395.7,-751.97 3405.77,-741.9 3405.77,-722.18 3415.35,-712.6 3623.59,-712.6 3633.99,-702.2 ; v1(3671.26,-673.23) 3648.09,-696.39 3639.79,-696.39 3633.99,-702.2 ; R11.1 3714.57,-742.13 3708.29,-748.41 3708.29,-751.06 3643.15,-751.06 3633.99,-741.9 3633.99,-702.2
  Bottom Layer w8: v1(3671.26,-673.23) 3674.42,-673.23 3687.48,-686.28 3743.18,-686.28 3760.57,-668.9 AP2112.1 3877.56,-668.9 C3.2
  other v1: 3892.13,-685.04
V_USB: C4.2 C5.2 D2.2 TP2.4 | length 372.6
  Top Layer w8: v1(3732.28,-620.08) 3732.28,-639.76 3768.38,-675.86 TP2.4@3768.38,-688.56 ; TP2.4@3768.4,-688.58 TP2.4
  Bottom Layer w8: v1(3732.28,-620.08) 3771.65,-620.08 3769.68,-618.11 C5.2 3769.68,-566.93 3761.44,-558.68 3743.61,-558.68 3701,-516.08 3701,-491.8 3722.72,-470.08 D2.2
Vref: C6.2 D3.1 D3.2 R15.1 U1.51 | length 825.5
  Top Layer w8: R15.1 3224.97,-434.07 3224.97,-410.01 3204.72,-389.76 D3.1 3183.07,-387.8 3190.88,-379.98 3192.85,-379.98 3220.47,-352.36 D3.2 3220.47,-279.5 3212.54,-271.56 3210.57,-271.56 3198.82,-259.82 C6.2 3198.82,-255.88 3187.07,-244.13 3185.1,-244.13 3155.45,-214.48 3155.45,-81.01 3141.67,-67.23 3141.67,-42.04 3166.19,-17.53 3383.45,-17.53 3435.84,-69.92 3435.84,-71.22 U1.51
X32I: C16.1 U1.5 X1.2 | length 330.2
  Top Layer w8: C16.1 X1.2 3324.93,-588.46 3324.93,-370.74 U1.5
X32O: C15.1 U1.4 X1.1 | length 400.6
  Top Layer w8: C15.1 X1.1 3222.44,-581.21 3256.47,-547.18 3298.53,-547.18 3310.9,-534.81 3310.9,-362.5 U1.4
pads on no net: AP2112.4 J1. MPU-9250.2 MPU-9250.3 MPU-9250.4 MPU-9250.5 MPU-9250.6 MPU-9250.7 MPU-9250.14 MPU-9250.15 MPU-9250.16 MPU-9250.17 MPU-9250.19 MPU-9250.21 MPU-9250.25 SB3.1 SB3.@3376.18,-635.43 SB3.@3663.58,-635.43 SB3.@3663.58,-722.05 U1.2 U1.8 U1.9 U1.12 U1.28 U1.38 U1.39 U1.40 U1.53 U1.54 U1.55 U1.56 U1.64 X2.
copper on no net:
  other v1: 3460.83,-678.74 3578.94,-678.74
  other v2: 2998.03,-125.99

## Keep-outs
Keep-Out Layer:
  the board outline again, w10